# EAGLE board Led_Board_rund (EAGLE 5.02)
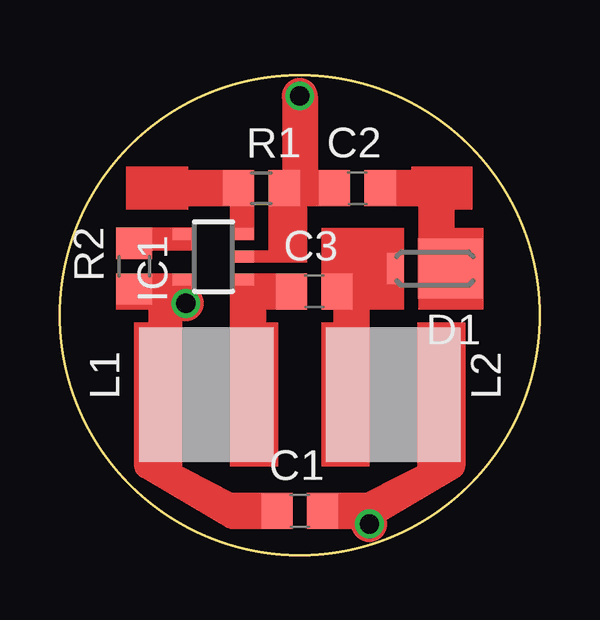
[diagram p0: board, top side]
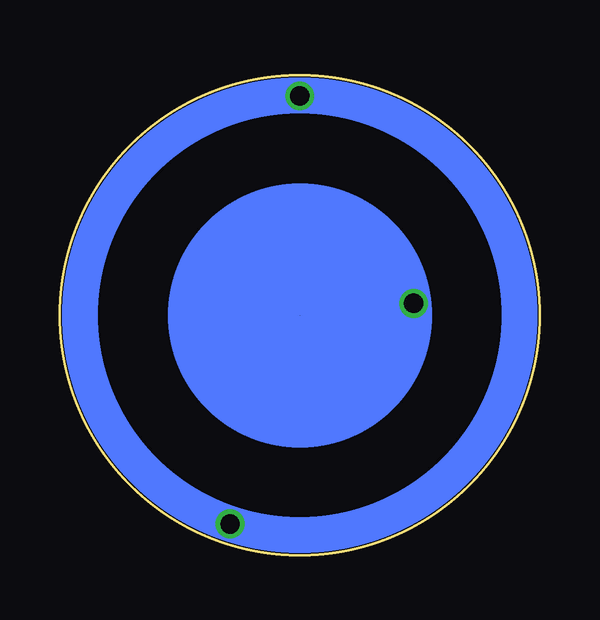
[diagram p1: board, bottom side, seen from below]

Size 20 x 20 mm. Coordinates in mm from the lower left corner, seen from the top.
Outline: circle at 10,10 radius 10
Copper layers (1*16): Top 0.035mm / dielectric 1.5mm / Bottom 0.035mm
Design rules "default": minimum track width 10mil, minimum drill 24mil, track to track 8mil, track to pad 8mil, pad to pad 8mil, via to via 8mil, smd to smd 8mil, copper to edge 40mil, drill to drill 8mil, minimum pad ring 10mil, minimum via ring 8mil, stop-mask expansion 4mil, vias tented up to drill 0mil, thermal gap 10mil

## Footprints (pad centres in the part's own frame; a part is rotated, then mirrored left to right if it is on the bottom)
C0805 = smd 1.3 x 1.5: 1 -0.95,0; 2 0.95,0
POWERMITE = smd 2.7 x 2.5: 1 -0.635,0 | smd 0.7 x 1.3: 2 1.665,0
SOT23-5 = smd 0.5 x 1: 1 -0.95,-1.2; 2 0,-1.2; 3 0.95,-1.2; 4 0.95,1.2; 5 -0.95,1.2
R0805 = smd 1.3 x 1.5: 1 -0.95,0; 2 0.95,0

## Placement (x,y rotation side)
C1  [C0805]  10,1.85 0 top
C2  [C0805]  12.4,15.3 0 top
C3  [C0805]  10.6,11 0 top
D1  [POWERMITE]  15.65,11.95 180 top
IC1  [SOT23-5]  6.4,12.45 90 top
R1  [R0805]  8.4,15.3 0 top
R2  [R0805]  3.1,12.05 90 top

## Library data of the parts
C1-C3 R1 R2 = rcl
D1 = diode
IC1 = zetex

## Tracks (layer width: path | path; a pad name or v marks a point on that pad's centre or on a via)
S$1  (via drill 0.8)
  Top 1.5: v10,19.15 10,15.3
S$2
  Top 1: 7.15,1.6 3.6,3.7
S$3
  Top 1: 7.15,2.05 4,3.7
S$4
  Top 1: 12.85,1.6 16.4,3.7
S$5
  Top 1: 12.85,2.1 16,3.7
S$6  (via drill 0.8)
  Top 1.5: v5.25,10.5 4.7,10.5
S$7  (via drill 0.8)
  Top 1.5: v12.9,1.3 12.55,1.85
(copper drawn outside any net)
  shapes: Bottom circle x2, Top area x25

## Text on the board
tNames: L1 | L2